# EAGLE board amphenol_npa201_pan (EAGLE 8.2.2), part 1 of 2
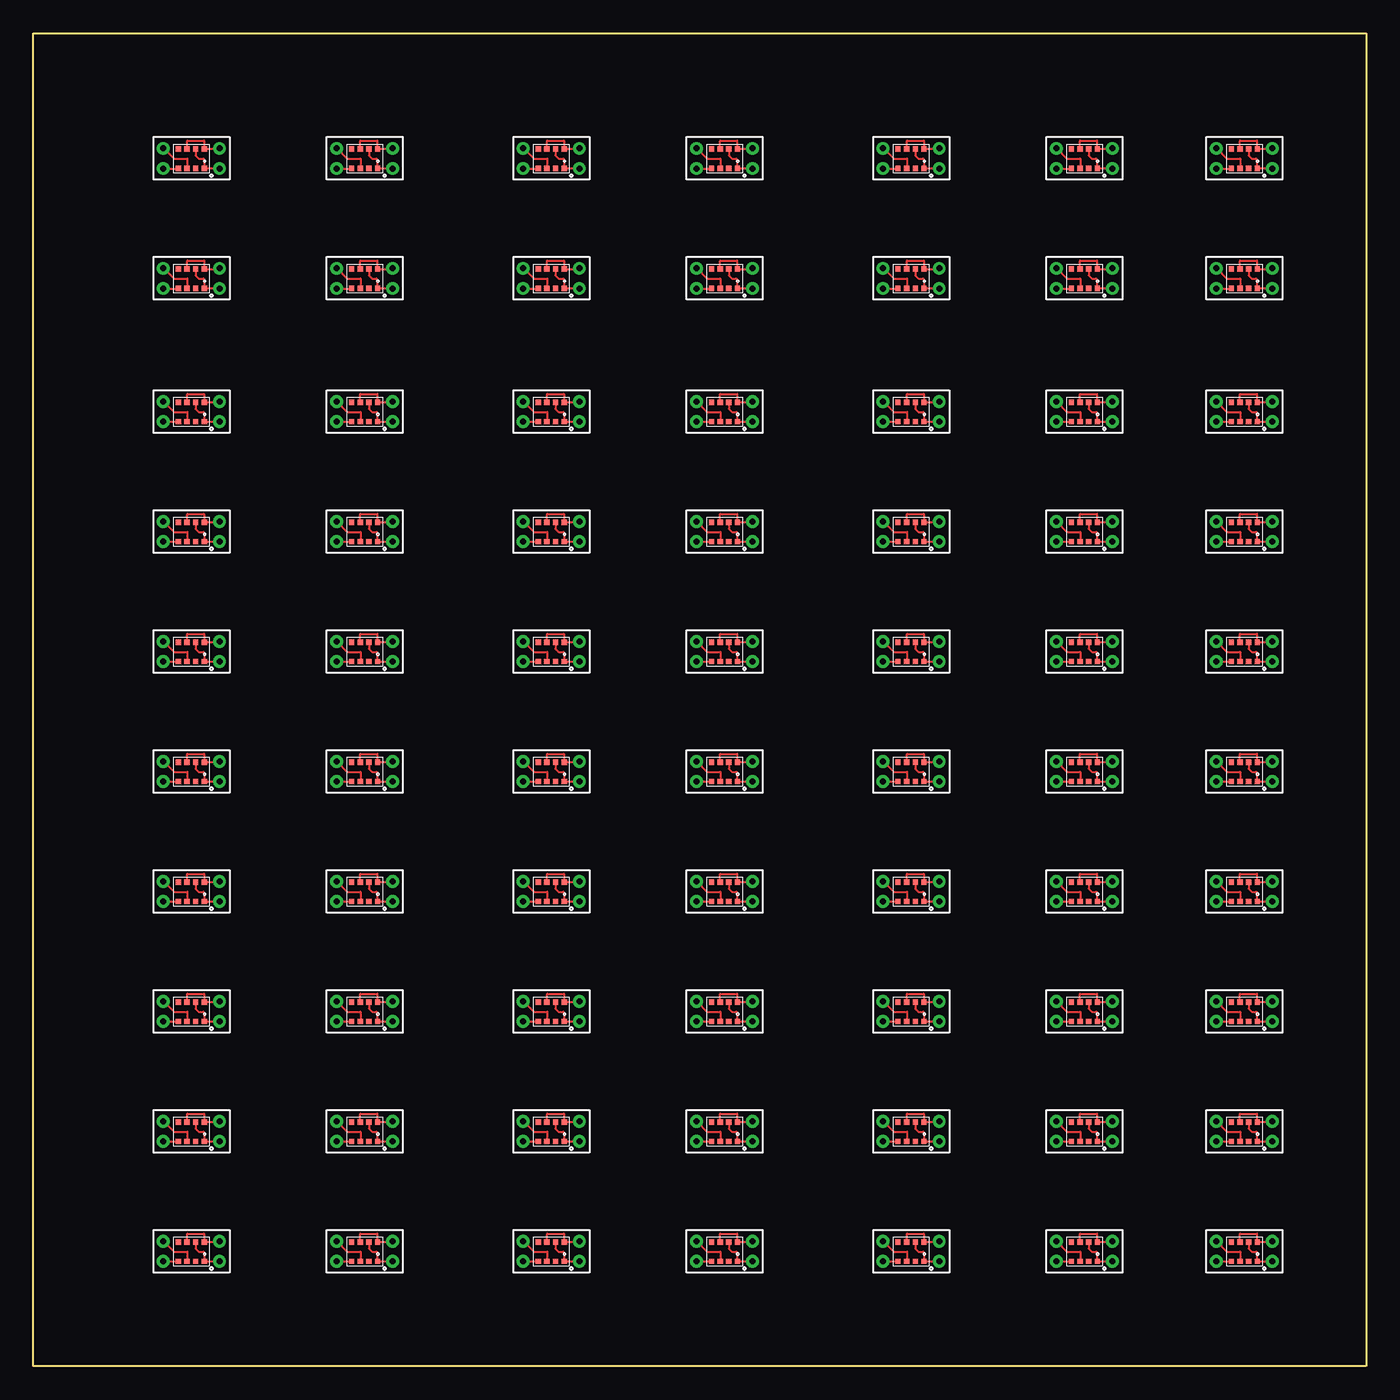
[diagram p0: board, top side]

Size 100 x 100 mm. Coordinates in mm from the lower left corner, seen from the top.
Outline: 0,0 0,100 100,100 100,0 0,0
Copper layers (1*16): Top 0.035mm / dielectric 1.5mm / Bottom 0.035mm
Design rules "default": minimum track width 6mil, minimum drill 0.35mm, track to track 6mil, track to pad 6mil, pad to pad 6mil, via to via 6mil, smd to smd 6mil, copper to edge 40mil, drill to drill 6mil, minimum pad ring 10mil, minimum via ring 8mil, stop-mask expansion 4mil, vias tented up to drill 0mil, thermal gap 10mil

## Footprints (pad centres in the part's own frame; a part is rotated, then mirrored left to right if it is on the bottom)
AMPHENOL_NPA201 = smd 0.4 x 0.4: P$1 0.975,-0.725; P$2 0.325,-0.725; P$3 -0.325,-0.725; P$4 -0.975,-0.725; P$5 -0.975,0.725; P$6 -0.325,0.725; P$7 0.325,0.725; P$8 0.975,0.725
WIREPAD_0,8/0,45 = drill 0.45 pad 0.71: P$1 0,0

## Placement (x,y rotation side)
U$1  AMPHENOL_NPA201  [AMPHENOL_NPA201]  11.85,8.6 0 top
U$2  WIREPAD_0,8/0,45  [WIREPAD_0,8/0,45]  9.75,9.36 0 top
U$3  WIREPAD_0,8/0,45  [WIREPAD_0,8/0,45]  9.75,7.86 0 top
U$4  WIREPAD_0,8/0,45  [WIREPAD_0,8/0,45]  13.97,9.36 0 top
U$5  WIREPAD_0,8/0,45  [WIREPAD_0,8/0,45]  13.97,7.86 0 top
U$6  WIREPAD_0,8/0,45  [WIREPAD_0,8/0,45]  9.75,18.36 0 top
U$7  WIREPAD_0,8/0,45  [WIREPAD_0,8/0,45]  9.75,16.86 0 top
U$8  WIREPAD_0,8/0,45  [WIREPAD_0,8/0,45]  13.97,18.36 0 top
U$9  WIREPAD_0,8/0,45  [WIREPAD_0,8/0,45]  13.97,16.86 0 top
U$10  AMPHENOL_NPA201  [AMPHENOL_NPA201]  11.85,17.6 0 top
U$11  WIREPAD_0,8/0,45  [WIREPAD_0,8/0,45]  9.75,27.36 0 top
U$12  WIREPAD_0,8/0,45  [WIREPAD_0,8/0,45]  9.75,25.86 0 top
U$13  WIREPAD_0,8/0,45  [WIREPAD_0,8/0,45]  13.97,27.36 0 top
U$14  WIREPAD_0,8/0,45  [WIREPAD_0,8/0,45]  13.97,25.86 0 top
U$15  AMPHENOL_NPA201  [AMPHENOL_NPA201]  11.85,26.6 0 top
U$16  WIREPAD_0,8/0,45  [WIREPAD_0,8/0,45]  9.75,36.36 0 top
U$17  WIREPAD_0,8/0,45  [WIREPAD_0,8/0,45]  9.75,34.86 0 top
U$18  WIREPAD_0,8/0,45  [WIREPAD_0,8/0,45]  13.97,36.36 0 top
U$19  WIREPAD_0,8/0,45  [WIREPAD_0,8/0,45]  13.97,34.86 0 top
U$20  AMPHENOL_NPA201  [AMPHENOL_NPA201]  11.85,35.6 0 top
U$21  WIREPAD_0,8/0,45  [WIREPAD_0,8/0,45]  9.75,45.36 0 top
U$22  WIREPAD_0,8/0,45  [WIREPAD_0,8/0,45]  9.75,43.86 0 top
U$23  WIREPAD_0,8/0,45  [WIREPAD_0,8/0,45]  13.97,45.36 0 top
U$24  WIREPAD_0,8/0,45  [WIREPAD_0,8/0,45]  13.97,43.86 0 top
U$25  AMPHENOL_NPA201  [AMPHENOL_NPA201]  11.85,44.6 0 top
U$26  WIREPAD_0,8/0,45  [WIREPAD_0,8/0,45]  9.75,54.36 0 top
U$27  WIREPAD_0,8/0,45  [WIREPAD_0,8/0,45]  9.75,52.86 0 top
U$28  WIREPAD_0,8/0,45  [WIREPAD_0,8/0,45]  13.97,54.36 0 top
U$29  WIREPAD_0,8/0,45  [WIREPAD_0,8/0,45]  13.97,52.86 0 top
U$30  AMPHENOL_NPA201  [AMPHENOL_NPA201]  11.85,53.6 0 top
U$31  WIREPAD_0,8/0,45  [WIREPAD_0,8/0,45]  9.75,63.36 0 top
U$32  WIREPAD_0,8/0,45  [WIREPAD_0,8/0,45]  9.75,61.86 0 top
U$33  WIREPAD_0,8/0,45  [WIREPAD_0,8/0,45]  13.97,63.36 0 top
U$34  WIREPAD_0,8/0,45  [WIREPAD_0,8/0,45]  13.97,61.86 0 top
U$35  AMPHENOL_NPA201  [AMPHENOL_NPA201]  11.85,62.6 0 top
U$36  WIREPAD_0,8/0,45  [WIREPAD_0,8/0,45]  9.75,72.36 0 top
U$37  WIREPAD_0,8/0,45  [WIREPAD_0,8/0,45]  9.75,70.86 0 top
U$38  WIREPAD_0,8/0,45  [WIREPAD_0,8/0,45]  13.97,72.36 0 top
U$39  WIREPAD_0,8/0,45  [WIREPAD_0,8/0,45]  13.97,70.86 0 top
U$40  AMPHENOL_NPA201  [AMPHENOL_NPA201]  11.85,71.6 0 top
U$41  WIREPAD_0,8/0,45  [WIREPAD_0,8/0,45]  9.75,82.36 0 top
U$42  WIREPAD_0,8/0,45  [WIREPAD_0,8/0,45]  9.75,80.86 0 top
U$43  WIREPAD_0,8/0,45  [WIREPAD_0,8/0,45]  13.97,82.36 0 top
U$44  WIREPAD_0,8/0,45  [WIREPAD_0,8/0,45]  13.97,80.86 0 top
U$45  AMPHENOL_NPA201  [AMPHENOL_NPA201]  11.85,81.6 0 top
U$46  WIREPAD_0,8/0,45  [WIREPAD_0,8/0,45]  9.75,91.36 0 top
U$47  WIREPAD_0,8/0,45  [WIREPAD_0,8/0,45]  9.75,89.86 0 top
U$48  WIREPAD_0,8/0,45  [WIREPAD_0,8/0,45]  13.97,91.36 0 top
U$49  WIREPAD_0,8/0,45  [WIREPAD_0,8/0,45]  13.97,89.86 0 top
U$50  AMPHENOL_NPA201  [AMPHENOL_NPA201]  11.85,90.6 0 top
U$51  WIREPAD_0,8/0,45  [WIREPAD_0,8/0,45]  22.75,9.36 0 top
U$52  WIREPAD_0,8/0,45  [WIREPAD_0,8/0,45]  22.75,7.86 0 top
U$53  WIREPAD_0,8/0,45  [WIREPAD_0,8/0,45]  26.97,9.36 0 top
U$54  WIREPAD_0,8/0,45  [WIREPAD_0,8/0,45]  26.97,7.86 0 top
U$55  AMPHENOL_NPA201  [AMPHENOL_NPA201]  24.85,8.6 0 top
U$56  WIREPAD_0,8/0,45  [WIREPAD_0,8/0,45]  22.75,18.36 0 top
U$57  WIREPAD_0,8/0,45  [WIREPAD_0,8/0,45]  22.75,16.86 0 top
U$58  WIREPAD_0,8/0,45  [WIREPAD_0,8/0,45]  26.97,18.36 0 top
U$59  WIREPAD_0,8/0,45  [WIREPAD_0,8/0,45]  26.97,16.86 0 top
U$60  AMPHENOL_NPA201  [AMPHENOL_NPA201]  24.85,17.6 0 top
U$61  WIREPAD_0,8/0,45  [WIREPAD_0,8/0,45]  22.75,27.36 0 top
U$62  WIREPAD_0,8/0,45  [WIREPAD_0,8/0,45]  22.75,25.86 0 top
U$63  WIREPAD_0,8/0,45  [WIREPAD_0,8/0,45]  26.97,27.36 0 top
U$64  WIREPAD_0,8/0,45  [WIREPAD_0,8/0,45]  26.97,25.86 0 top
U$65  AMPHENOL_NPA201  [AMPHENOL_NPA201]  24.85,26.6 0 top
U$66  WIREPAD_0,8/0,45  [WIREPAD_0,8/0,45]  22.75,36.36 0 top
U$67  WIREPAD_0,8/0,45  [WIREPAD_0,8/0,45]  22.75,34.86 0 top
U$68  WIREPAD_0,8/0,45  [WIREPAD_0,8/0,45]  26.97,36.36 0 top
U$69  WIREPAD_0,8/0,45  [WIREPAD_0,8/0,45]  26.97,34.86 0 top
U$70  AMPHENOL_NPA201  [AMPHENOL_NPA201]  24.85,35.6 0 top
U$71  WIREPAD_0,8/0,45  [WIREPAD_0,8/0,45]  22.75,45.36 0 top
U$72  WIREPAD_0,8/0,45  [WIREPAD_0,8/0,45]  22.75,43.86 0 top
U$73  WIREPAD_0,8/0,45  [WIREPAD_0,8/0,45]  26.97,45.36 0 top
U$74  WIREPAD_0,8/0,45  [WIREPAD_0,8/0,45]  26.97,43.86 0 top
U$75  AMPHENOL_NPA201  [AMPHENOL_NPA201]  24.85,44.6 0 top
U$76  WIREPAD_0,8/0,45  [WIREPAD_0,8/0,45]  22.75,54.36 0 top
U$77  WIREPAD_0,8/0,45  [WIREPAD_0,8/0,45]  22.75,52.86 0 top
U$78  WIREPAD_0,8/0,45  [WIREPAD_0,8/0,45]  26.97,54.36 0 top
U$79  WIREPAD_0,8/0,45  [WIREPAD_0,8/0,45]  26.97,52.86 0 top
U$80  AMPHENOL_NPA201  [AMPHENOL_NPA201]  24.85,53.6 0 top
U$81  WIREPAD_0,8/0,45  [WIREPAD_0,8/0,45]  22.75,63.36 0 top
U$82  WIREPAD_0,8/0,45  [WIREPAD_0,8/0,45]  22.75,61.86 0 top
U$83  WIREPAD_0,8/0,45  [WIREPAD_0,8/0,45]  26.97,63.36 0 top
U$84  WIREPAD_0,8/0,45  [WIREPAD_0,8/0,45]  26.97,61.86 0 top
U$85  AMPHENOL_NPA201  [AMPHENOL_NPA201]  24.85,62.6 0 top
U$86  WIREPAD_0,8/0,45  [WIREPAD_0,8/0,45]  22.75,72.36 0 top
U$87  WIREPAD_0,8/0,45  [WIREPAD_0,8/0,45]  22.75,70.86 0 top
U$88  WIREPAD_0,8/0,45  [WIREPAD_0,8/0,45]  26.97,72.36 0 top
U$89  WIREPAD_0,8/0,45  [WIREPAD_0,8/0,45]  26.97,70.86 0 top
U$90  AMPHENOL_NPA201  [AMPHENOL_NPA201]  24.85,71.6 0 top
U$91  WIREPAD_0,8/0,45  [WIREPAD_0,8/0,45]  22.75,82.36 0 top
U$92  WIREPAD_0,8/0,45  [WIREPAD_0,8/0,45]  22.75,80.86 0 top
U$93  WIREPAD_0,8/0,45  [WIREPAD_0,8/0,45]  26.97,82.36 0 top
U$94  WIREPAD_0,8/0,45  [WIREPAD_0,8/0,45]  26.97,80.86 0 top
U$95  AMPHENOL_NPA201  [AMPHENOL_NPA201]  24.85,81.6 0 top
U$96  WIREPAD_0,8/0,45  [WIREPAD_0,8/0,45]  22.75,91.36 0 top
U$97  WIREPAD_0,8/0,45  [WIREPAD_0,8/0,45]  22.75,89.86 0 top
U$98  WIREPAD_0,8/0,45  [WIREPAD_0,8/0,45]  26.97,91.36 0 top
U$99  WIREPAD_0,8/0,45  [WIREPAD_0,8/0,45]  26.97,89.86 0 top
U$100  AMPHENOL_NPA201  [AMPHENOL_NPA201]  24.85,90.6 0 top
U$101  WIREPAD_0,8/0,45  [WIREPAD_0,8/0,45]  36.75,9.36 0 top
U$102  WIREPAD_0,8/0,45  [WIREPAD_0,8/0,45]  36.75,7.86 0 top
U$103  WIREPAD_0,8/0,45  [WIREPAD_0,8/0,45]  40.97,9.36 0 top
U$104  WIREPAD_0,8/0,45  [WIREPAD_0,8/0,45]  40.97,7.86 0 top
U$105  AMPHENOL_NPA201  [AMPHENOL_NPA201]  38.85,8.6 0 top
U$106  WIREPAD_0,8/0,45  [WIREPAD_0,8/0,45]  36.75,18.36 0 top
U$107  WIREPAD_0,8/0,45  [WIREPAD_0,8/0,45]  36.75,16.86 0 top
U$108  WIREPAD_0,8/0,45  [WIREPAD_0,8/0,45]  40.97,18.36 0 top
U$109  WIREPAD_0,8/0,45  [WIREPAD_0,8/0,45]  40.97,16.86 0 top
U$110  AMPHENOL_NPA201  [AMPHENOL_NPA201]  38.85,17.6 0 top
U$111  WIREPAD_0,8/0,45  [WIREPAD_0,8/0,45]  36.75,27.36 0 top
U$112  WIREPAD_0,8/0,45  [WIREPAD_0,8/0,45]  36.75,25.86 0 top
U$113  WIREPAD_0,8/0,45  [WIREPAD_0,8/0,45]  40.97,27.36 0 top
U$114  WIREPAD_0,8/0,45  [WIREPAD_0,8/0,45]  40.97,25.86 0 top
U$115  AMPHENOL_NPA201  [AMPHENOL_NPA201]  38.85,26.6 0 top
U$116  WIREPAD_0,8/0,45  [WIREPAD_0,8/0,45]  36.75,36.36 0 top
U$117  WIREPAD_0,8/0,45  [WIREPAD_0,8/0,45]  36.75,34.86 0 top
U$118  WIREPAD_0,8/0,45  [WIREPAD_0,8/0,45]  40.97,36.36 0 top
U$119  WIREPAD_0,8/0,45  [WIREPAD_0,8/0,45]  40.97,34.86 0 top
U$120  AMPHENOL_NPA201  [AMPHENOL_NPA201]  38.85,35.6 0 top
U$121  WIREPAD_0,8/0,45  [WIREPAD_0,8/0,45]  36.75,45.36 0 top
U$122  WIREPAD_0,8/0,45  [WIREPAD_0,8/0,45]  36.75,43.86 0 top
U$123  WIREPAD_0,8/0,45  [WIREPAD_0,8/0,45]  40.97,45.36 0 top
U$124  WIREPAD_0,8/0,45  [WIREPAD_0,8/0,45]  40.97,43.86 0 top
U$125  AMPHENOL_NPA201  [AMPHENOL_NPA201]  38.85,44.6 0 top
U$126  WIREPAD_0,8/0,45  [WIREPAD_0,8/0,45]  36.75,54.36 0 top
U$127  WIREPAD_0,8/0,45  [WIREPAD_0,8/0,45]  36.75,52.86 0 top
U$128  WIREPAD_0,8/0,45  [WIREPAD_0,8/0,45]  40.97,54.36 0 top
U$129  WIREPAD_0,8/0,45  [WIREPAD_0,8/0,45]  40.97,52.86 0 top
U$130  AMPHENOL_NPA201  [AMPHENOL_NPA201]  38.85,53.6 0 top
U$131  WIREPAD_0,8/0,45  [WIREPAD_0,8/0,45]  36.75,63.36 0 top
U$132  WIREPAD_0,8/0,45  [WIREPAD_0,8/0,45]  36.75,61.86 0 top
U$133  WIREPAD_0,8/0,45  [WIREPAD_0,8/0,45]  40.97,63.36 0 top
U$134  WIREPAD_0,8/0,45  [WIREPAD_0,8/0,45]  40.97,61.86 0 top
U$135  AMPHENOL_NPA201  [AMPHENOL_NPA201]  38.85,62.6 0 top
U$136  WIREPAD_0,8/0,45  [WIREPAD_0,8/0,45]  36.75,72.36 0 top
U$137  WIREPAD_0,8/0,45  [WIREPAD_0,8/0,45]  36.75,70.86 0 top
U$138  WIREPAD_0,8/0,45  [WIREPAD_0,8/0,45]  40.97,72.36 0 top
U$139  WIREPAD_0,8/0,45  [WIREPAD_0,8/0,45]  40.97,70.86 0 top
U$140  AMPHENOL_NPA201  [AMPHENOL_NPA201]  38.85,71.6 0 top
U$141  WIREPAD_0,8/0,45  [WIREPAD_0,8/0,45]  36.75,82.36 0 top
U$142  WIREPAD_0,8/0,45  [WIREPAD_0,8/0,45]  36.75,80.86 0 top
U$143  WIREPAD_0,8/0,45  [WIREPAD_0,8/0,45]  40.97,82.36 0 top
U$144  WIREPAD_0,8/0,45  [WIREPAD_0,8/0,45]  40.97,80.86 0 top
U$145  AMPHENOL_NPA201  [AMPHENOL_NPA201]  38.85,81.6 0 top
U$146  WIREPAD_0,8/0,45  [WIREPAD_0,8/0,45]  36.75,91.36 0 top
U$147  WIREPAD_0,8/0,45  [WIREPAD_0,8/0,45]  36.75,89.86 0 top
U$148  WIREPAD_0,8/0,45  [WIREPAD_0,8/0,45]  40.97,91.36 0 top
U$149  WIREPAD_0,8/0,45  [WIREPAD_0,8/0,45]  40.97,89.86 0 top
U$150  AMPHENOL_NPA201  [AMPHENOL_NPA201]  38.85,90.6 0 top
U$151  WIREPAD_0,8/0,45  [WIREPAD_0,8/0,45]  49.75,9.36 0 top
U$152  WIREPAD_0,8/0,45  [WIREPAD_0,8/0,45]  49.75,7.86 0 top
U$153  WIREPAD_0,8/0,45  [WIREPAD_0,8/0,45]  53.97,9.36 0 top
U$154  WIREPAD_0,8/0,45  [WIREPAD_0,8/0,45]  53.97,7.86 0 top
U$155  AMPHENOL_NPA201  [AMPHENOL_NPA201]  51.85,8.6 0 top
U$156  WIREPAD_0,8/0,45  [WIREPAD_0,8/0,45]  49.75,18.36 0 top
U$157  WIREPAD_0,8/0,45  [WIREPAD_0,8/0,45]  49.75,16.86 0 top
U$158  WIREPAD_0,8/0,45  [WIREPAD_0,8/0,45]  53.97,18.36 0 top
U$159  WIREPAD_0,8/0,45  [WIREPAD_0,8/0,45]  53.97,16.86 0 top
U$160  AMPHENOL_NPA201  [AMPHENOL_NPA201]  51.85,17.6 0 top
U$161  WIREPAD_0,8/0,45  [WIREPAD_0,8/0,45]  49.75,27.36 0 top
U$162  WIREPAD_0,8/0,45  [WIREPAD_0,8/0,45]  49.75,25.86 0 top
U$163  WIREPAD_0,8/0,45  [WIREPAD_0,8/0,45]  53.97,27.36 0 top
U$164  WIREPAD_0,8/0,45  [WIREPAD_0,8/0,45]  53.97,25.86 0 top
U$165  AMPHENOL_NPA201  [AMPHENOL_NPA201]  51.85,26.6 0 top
U$166  WIREPAD_0,8/0,45  [WIREPAD_0,8/0,45]  49.75,36.36 0 top
U$167  WIREPAD_0,8/0,45  [WIREPAD_0,8/0,45]  49.75,34.86 0 top
U$168  WIREPAD_0,8/0,45  [WIREPAD_0,8/0,45]  53.97,36.36 0 top
U$169  WIREPAD_0,8/0,45  [WIREPAD_0,8/0,45]  53.97,34.86 0 top
U$170  AMPHENOL_NPA201  [AMPHENOL_NPA201]  51.85,35.6 0 top
U$171  WIREPAD_0,8/0,45  [WIREPAD_0,8/0,45]  49.75,45.36 0 top
U$172  WIREPAD_0,8/0,45  [WIREPAD_0,8/0,45]  49.75,43.86 0 top
U$173  WIREPAD_0,8/0,45  [WIREPAD_0,8/0,45]  53.97,45.36 0 top
U$174  WIREPAD_0,8/0,45  [WIREPAD_0,8/0,45]  53.97,43.86 0 top
U$175  AMPHENOL_NPA201  [AMPHENOL_NPA201]  51.85,44.6 0 top
U$176  WIREPAD_0,8/0,45  [WIREPAD_0,8/0,45]  49.75,54.36 0 top
U$177  WIREPAD_0,8/0,45  [WIREPAD_0,8/0,45]  49.75,52.86 0 top
U$178  WIREPAD_0,8/0,45  [WIREPAD_0,8/0,45]  53.97,54.36 0 top
U$179  WIREPAD_0,8/0,45  [WIREPAD_0,8/0,45]  53.97,52.86 0 top
U$180  AMPHENOL_NPA201  [AMPHENOL_NPA201]  51.85,53.6 0 top
U$181  WIREPAD_0,8/0,45  [WIREPAD_0,8/0,45]  49.75,63.36 0 top
U$182  WIREPAD_0,8/0,45  [WIREPAD_0,8/0,45]  49.75,61.86 0 top
U$183  WIREPAD_0,8/0,45  [WIREPAD_0,8/0,45]  53.97,63.36 0 top
U$184  WIREPAD_0,8/0,45  [WIREPAD_0,8/0,45]  53.97,61.86 0 top
U$185  AMPHENOL_NPA201  [AMPHENOL_NPA201]  51.85,62.6 0 top
U$186  WIREPAD_0,8/0,45  [WIREPAD_0,8/0,45]  49.75,72.36 0 top
U$187  WIREPAD_0,8/0,45  [WIREPAD_0,8/0,45]  49.75,70.86 0 top
U$188  WIREPAD_0,8/0,45  [WIREPAD_0,8/0,45]  53.97,72.36 0 top
U$189  WIREPAD_0,8/0,45  [WIREPAD_0,8/0,45]  53.97,70.86 0 top
U$190  AMPHENOL_NPA201  [AMPHENOL_NPA201]  51.85,71.6 0 top
U$191  WIREPAD_0,8/0,45  [WIREPAD_0,8/0,45]  49.75,82.36 0 top
U$192  WIREPAD_0,8/0,45  [WIREPAD_0,8/0,45]  49.75,80.86 0 top
U$193  WIREPAD_0,8/0,45  [WIREPAD_0,8/0,45]  53.97,82.36 0 top
U$194  WIREPAD_0,8/0,45  [WIREPAD_0,8/0,45]  53.97,80.86 0 top
U$195  AMPHENOL_NPA201  [AMPHENOL_NPA201]  51.85,81.6 0 top
U$196  WIREPAD_0,8/0,45  [WIREPAD_0,8/0,45]  49.75,91.36 0 top
U$197  WIREPAD_0,8/0,45  [WIREPAD_0,8/0,45]  49.75,89.86 0 top
U$198  WIREPAD_0,8/0,45  [WIREPAD_0,8/0,45]  53.97,91.36 0 top
U$199  WIREPAD_0,8/0,45  [WIREPAD_0,8/0,45]  53.97,89.86 0 top
U$200  AMPHENOL_NPA201  [AMPHENOL_NPA201]  51.85,90.6 0 top
U$201  WIREPAD_0,8/0,45  [WIREPAD_0,8/0,45]  63.75,9.36 0 top
U$202  WIREPAD_0,8/0,45  [WIREPAD_0,8/0,45]  63.75,7.86 0 top
U$203  WIREPAD_0,8/0,45  [WIREPAD_0,8/0,45]  67.97,9.36 0 top
U$204  WIREPAD_0,8/0,45  [WIREPAD_0,8/0,45]  67.97,7.86 0 top
U$205  AMPHENOL_NPA201  [AMPHENOL_NPA201]  65.85,8.6 0 top
U$206  WIREPAD_0,8/0,45  [WIREPAD_0,8/0,45]  63.75,18.36 0 top
U$207  WIREPAD_0,8/0,45  [WIREPAD_0,8/0,45]  63.75,16.86 0 top
U$208  WIREPAD_0,8/0,45  [WIREPAD_0,8/0,45]  67.97,18.36 0 top
U$209  WIREPAD_0,8/0,45  [WIREPAD_0,8/0,45]  67.97,16.86 0 top
U$210  AMPHENOL_NPA201  [AMPHENOL_NPA201]  65.85,17.6 0 top
U$211  WIREPAD_0,8/0,45  [WIREPAD_0,8/0,45]  63.75,27.36 0 top
U$212  WIREPAD_0,8/0,45  [WIREPAD_0,8/0,45]  63.75,25.86 0 top
U$213  WIREPAD_0,8/0,45  [WIREPAD_0,8/0,45]  67.97,27.36 0 top
U$214  WIREPAD_0,8/0,45  [WIREPAD_0,8/0,45]  67.97,25.86 0 top
U$215  AMPHENOL_NPA201  [AMPHENOL_NPA201]  65.85,26.6 0 top
U$216  WIREPAD_0,8/0,45  [WIREPAD_0,8/0,45]  63.75,36.36 0 top
U$217  WIREPAD_0,8/0,45  [WIREPAD_0,8/0,45]  63.75,34.86 0 top
U$218  WIREPAD_0,8/0,45  [WIREPAD_0,8/0,45]  67.97,36.36 0 top
U$219  WIREPAD_0,8/0,45  [WIREPAD_0,8/0,45]  67.97,34.86 0 top
U$220  AMPHENOL_NPA201  [AMPHENOL_NPA201]  65.85,35.6 0 top
U$221  WIREPAD_0,8/0,45  [WIREPAD_0,8/0,45]  63.75,45.36 0 top
U$222  WIREPAD_0,8/0,45  [WIREPAD_0,8/0,45]  63.75,43.86 0 top
U$223  WIREPAD_0,8/0,45  [WIREPAD_0,8/0,45]  67.97,45.36 0 top
U$224  WIREPAD_0,8/0,45  [WIREPAD_0,8/0,45]  67.97,43.86 0 top
U$225  AMPHENOL_NPA201  [AMPHENOL_NPA201]  65.85,44.6 0 top
U$226  WIREPAD_0,8/0,45  [WIREPAD_0,8/0,45]  63.75,54.36 0 top
U$227  WIREPAD_0,8/0,45  [WIREPAD_0,8/0,45]  63.75,52.86 0 top
U$228  WIREPAD_0,8/0,45  [WIREPAD_0,8/0,45]  67.97,54.36 0 top
U$229  WIREPAD_0,8/0,45  [WIREPAD_0,8/0,45]  67.97,52.86 0 top
U$230  AMPHENOL_NPA201  [AMPHENOL_NPA201]  65.85,53.6 0 top
U$231  WIREPAD_0,8/0,45  [WIREPAD_0,8/0,45]  63.75,63.36 0 top
U$232  WIREPAD_0,8/0,45  [WIREPAD_0,8/0,45]  63.75,61.86 0 top
U$233  WIREPAD_0,8/0,45  [WIREPAD_0,8/0,45]  67.97,63.36 0 top
U$234  WIREPAD_0,8/0,45  [WIREPAD_0,8/0,45]  67.97,61.86 0 top
U$235  AMPHENOL_NPA201  [AMPHENOL_NPA201]  65.85,62.6 0 top
U$236  WIREPAD_0,8/0,45  [WIREPAD_0,8/0,45]  63.75,72.36 0 top
U$237  WIREPAD_0,8/0,45  [WIREPAD_0,8/0,45]  63.75,70.86 0 top
U$238  WIREPAD_0,8/0,45  [WIREPAD_0,8/0,45]  67.97,72.36 0 top
U$239  WIREPAD_0,8/0,45  [WIREPAD_0,8/0,45]  67.97,70.86 0 top
U$240  AMPHENOL_NPA201  [AMPHENOL_NPA201]  65.85,71.6 0 top
U$241  WIREPAD_0,8/0,45  [WIREPAD_0,8/0,45]  63.75,82.36 0 top
U$242  WIREPAD_0,8/0,45  [WIREPAD_0,8/0,45]  63.75,80.86 0 top
U$243  WIREPAD_0,8/0,45  [WIREPAD_0,8/0,45]  67.97,82.36 0 top
U$244  WIREPAD_0,8/0,45  [WIREPAD_0,8/0,45]  67.97,80.86 0 top
U$245  AMPHENOL_NPA201  [AMPHENOL_NPA201]  65.85,81.6 0 top
U$246  WIREPAD_0,8/0,45  [WIREPAD_0,8/0,45]  63.75,91.36 0 top
U$247  WIREPAD_0,8/0,45  [WIREPAD_0,8/0,45]  63.75,89.86 0 top
U$248  WIREPAD_0,8/0,45  [WIREPAD_0,8/0,45]  67.97,91.36 0 top
U$249  WIREPAD_0,8/0,45  [WIREPAD_0,8/0,45]  67.97,89.86 0 top
U$250  AMPHENOL_NPA201  [AMPHENOL_NPA201]  65.85,90.6 0 top
U$251  WIREPAD_0,8/0,45  [WIREPAD_0,8/0,45]  76.75,9.36 0 top
U$252  WIREPAD_0,8/0,45  [WIREPAD_0,8/0,45]  76.75,7.86 0 top
U$253  WIREPAD_0,8/0,45  [WIREPAD_0,8/0,45]  80.97,9.36 0 top
U$254  WIREPAD_0,8/0,45  [WIREPAD_0,8/0,45]  80.97,7.86 0 top
U$255  AMPHENOL_NPA201  [AMPHENOL_NPA201]  78.85,8.6 0 top
U$256  WIREPAD_0,8/0,45  [WIREPAD_0,8/0,45]  76.75,18.36 0 top
U$257  WIREPAD_0,8/0,45  [WIREPAD_0,8/0,45]  76.75,16.86 0 top
U$258  WIREPAD_0,8/0,45  [WIREPAD_0,8/0,45]  80.97,18.36 0 top
U$259  WIREPAD_0,8/0,45  [WIREPAD_0,8/0,45]  80.97,16.86 0 top
U$260  AMPHENOL_NPA201  [AMPHENOL_NPA201]  78.85,17.6 0 top
U$261  WIREPAD_0,8/0,45  [WIREPAD_0,8/0,45]  76.75,27.36 0 top
U$262  WIREPAD_0,8/0,45  [WIREPAD_0,8/0,45]  76.75,25.86 0 top
U$263  WIREPAD_0,8/0,45  [WIREPAD_0,8/0,45]  80.97,27.36 0 top
U$264  WIREPAD_0,8/0,45  [WIREPAD_0,8/0,45]  80.97,25.86 0 top
U$265  AMPHENOL_NPA201  [AMPHENOL_NPA201]  78.85,26.6 0 top
U$266  WIREPAD_0,8/0,45  [WIREPAD_0,8/0,45]  76.75,36.36 0 top
U$267  WIREPAD_0,8/0,45  [WIREPAD_0,8/0,45]  76.75,34.86 0 top
U$268  WIREPAD_0,8/0,45  [WIREPAD_0,8/0,45]  80.97,36.36 0 top
U$269  WIREPAD_0,8/0,45  [WIREPAD_0,8/0,45]  80.97,34.86 0 top
U$270  AMPHENOL_NPA201  [AMPHENOL_NPA201]  78.85,35.6 0 top
U$271  WIREPAD_0,8/0,45  [WIREPAD_0,8/0,45]  76.75,45.36 0 top
U$272  WIREPAD_0,8/0,45  [WIREPAD_0,8/0,45]  76.75,43.86 0 top
U$273  WIREPAD_0,8/0,45  [WIREPAD_0,8/0,45]  80.97,45.36 0 top
U$274  WIREPAD_0,8/0,45  [WIREPAD_0,8/0,45]  80.97,43.86 0 top
U$275  AMPHENOL_NPA201  [AMPHENOL_NPA201]  78.85,44.6 0 top
U$276  WIREPAD_0,8/0,45  [WIREPAD_0,8/0,45]  76.75,54.36 0 top
U$277  WIREPAD_0,8/0,45  [WIREPAD_0,8/0,45]  76.75,52.86 0 top
U$278  WIREPAD_0,8/0,45  [WIREPAD_0,8/0,45]  80.97,54.36 0 top
U$279  WIREPAD_0,8/0,45  [WIREPAD_0,8/0,45]  80.97,52.86 0 top
U$280  AMPHENOL_NPA201  [AMPHENOL_NPA201]  78.85,53.6 0 top
U$281  WIREPAD_0,8/0,45  [WIREPAD_0,8/0,45]  76.75,63.36 0 top
U$282  WIREPAD_0,8/0,45  [WIREPAD_0,8/0,45]  76.75,61.86 0 top
U$283  WIREPAD_0,8/0,45  [WIREPAD_0,8/0,45]  80.97,63.36 0 top
U$284  WIREPAD_0,8/0,45  [WIREPAD_0,8/0,45]  80.97,61.86 0 top
U$285  AMPHENOL_NPA201  [AMPHENOL_NPA201]  78.85,62.6 0 top
U$286  WIREPAD_0,8/0,45  [WIREPAD_0,8/0,45]  76.75,72.36 0 top
U$287  WIREPAD_0,8/0,45  [WIREPAD_0,8/0,45]  76.75,70.86 0 top
U$288  WIREPAD_0,8/0,45  [WIREPAD_0,8/0,45]  80.97,72.36 0 top
U$289  WIREPAD_0,8/0,45  [WIREPAD_0,8/0,45]  80.97,70.86 0 top
U$290  AMPHENOL_NPA201  [AMPHENOL_NPA201]  78.85,71.6 0 top
U$291  WIREPAD_0,8/0,45  [WIREPAD_0,8/0,45]  76.75,82.36 0 top
U$292  WIREPAD_0,8/0,45  [WIREPAD_0,8/0,45]  76.75,80.86 0 top
U$293  WIREPAD_0,8/0,45  [WIREPAD_0,8/0,45]  80.97,82.36 0 top
U$294  WIREPAD_0,8/0,45  [WIREPAD_0,8/0,45]  80.97,80.86 0 top
U$295  AMPHENOL_NPA201  [AMPHENOL_NPA201]  78.85,81.6 0 top
U$296  WIREPAD_0,8/0,45  [WIREPAD_0,8/0,45]  76.75,91.36 0 top
U$297  WIREPAD_0,8/0,45  [WIREPAD_0,8/0,45]  76.75,89.86 0 top
U$298  WIREPAD_0,8/0,45  [WIREPAD_0,8/0,45]  80.97,91.36 0 top
U$299  WIREPAD_0,8/0,45  [WIREPAD_0,8/0,45]  80.97,89.86 0 top
U$300  AMPHENOL_NPA201  [AMPHENOL_NPA201]  78.85,90.6 0 top
U$301  WIREPAD_0,8/0,45  [WIREPAD_0,8/0,45]  88.75,9.36 0 top
U$302  WIREPAD_0,8/0,45  [WIREPAD_0,8/0,45]  88.75,7.86 0 top
U$303  WIREPAD_0,8/0,45  [WIREPAD_0,8/0,45]  92.97,9.36 0 top
U$304  WIREPAD_0,8/0,45  [WIREPAD_0,8/0,45]  92.97,7.86 0 top
U$305  AMPHENOL_NPA201  [AMPHENOL_NPA201]  90.85,8.6 0 top
U$306  WIREPAD_0,8/0,45  [WIREPAD_0,8/0,45]  88.75,18.36 0 top
U$307  WIREPAD_0,8/0,45  [WIREPAD_0,8/0,45]  88.75,16.86 0 top
U$308  WIREPAD_0,8/0,45  [WIREPAD_0,8/0,45]  92.97,18.36 0 top
U$309  WIREPAD_0,8/0,45  [WIREPAD_0,8/0,45]  92.97,16.86 0 top
U$310  AMPHENOL_NPA201  [AMPHENOL_NPA201]  90.85,17.6 0 top
U$311  WIREPAD_0,8/0,45  [WIREPAD_0,8/0,45]  88.75,27.36 0 top
U$312  WIREPAD_0,8/0,45  [WIREPAD_0,8/0,45]  88.75,25.86 0 top
U$313  WIREPAD_0,8/0,45  [WIREPAD_0,8/0,45]  92.97,27.36 0 top
U$314  WIREPAD_0,8/0,45  [WIREPAD_0,8/0,45]  92.97,25.86 0 top
U$315  AMPHENOL_NPA201  [AMPHENOL_NPA201]  90.85,26.6 0 top
U$316  WIREPAD_0,8/0,45  [WIREPAD_0,8/0,45]  88.75,36.36 0 top
U$317  WIREPAD_0,8/0,45  [WIREPAD_0,8/0,45]  88.75,34.86 0 top
U$318  WIREPAD_0,8/0,45  [WIREPAD_0,8/0,45]  92.97,36.36 0 top
U$319  WIREPAD_0,8/0,45  [WIREPAD_0,8/0,45]  92.97,34.86 0 top
U$320  AMPHENOL_NPA201  [AMPHENOL_NPA201]  90.85,35.6 0 top
U$321  WIREPAD_0,8/0,45  [WIREPAD_0,8/0,45]  88.75,45.36 0 top
U$322  WIREPAD_0,8/0,45  [WIREPAD_0,8/0,45]  88.75,43.86 0 top
U$323  WIREPAD_0,8/0,45  [WIREPAD_0,8/0,45]  92.97,45.36 0 top
U$324  WIREPAD_0,8/0,45  [WIREPAD_0,8/0,45]  92.97,43.86 0 top
U$325  AMPHENOL_NPA201  [AMPHENOL_NPA201]  90.85,44.6 0 top
U$326  WIREPAD_0,8/0,45  [WIREPAD_0,8/0,45]  88.75,54.36 0 top
U$327  WIREPAD_0,8/0,45  [WIREPAD_0,8/0,45]  88.75,52.86 0 top
U$328  WIREPAD_0,8/0,45  [WIREPAD_0,8/0,45]  92.97,54.36 0 top
U$329  WIREPAD_0,8/0,45  [WIREPAD_0,8/0,45]  92.97,52.86 0 top
U$330  AMPHENOL_NPA201  [AMPHENOL_NPA201]  90.85,53.6 0 top
U$331  WIREPAD_0,8/0,45  [WIREPAD_0,8/0,45]  88.75,63.36 0 top
U$332  WIREPAD_0,8/0,45  [WIREPAD_0,8/0,45]  88.75,61.86 0 top
U$333  WIREPAD_0,8/0,45  [WIREPAD_0,8/0,45]  92.97,63.36 0 top
U$334  WIREPAD_0,8/0,45  [WIREPAD_0,8/0,45]  92.97,61.86 0 top
U$335  AMPHENOL_NPA201  [AMPHENOL_NPA201]  90.85,62.6 0 top
U$336  WIREPAD_0,8/0,45  [WIREPAD_0,8/0,45]  88.75,72.36 0 top
U$337  WIREPAD_0,8/0,45  [WIREPAD_0,8/0,45]  88.75,70.86 0 top
U$338  WIREPAD_0,8/0,45  [WIREPAD_0,8/0,45]  92.97,72.36 0 top
U$339  WIREPAD_0,8/0,45  [WIREPAD_0,8/0,45]  92.97,70.86 0 top
U$340  AMPHENOL_NPA201  [AMPHENOL_NPA201]  90.85,71.6 0 top
U$341  WIREPAD_0,8/0,45  [WIREPAD_0,8/0,45]  88.75,82.36 0 top
U$342  WIREPAD_0,8/0,45  [WIREPAD_0,8/0,45]  88.75,80.86 0 top
U$343  WIREPAD_0,8/0,45  [WIREPAD_0,8/0,45]  92.97,82.36 0 top
U$344  WIREPAD_0,8/0,45  [WIREPAD_0,8/0,45]  92.97,80.86 0 top
U$345  AMPHENOL_NPA201  [AMPHENOL_NPA201]  90.85,81.6 0 top
U$346  WIREPAD_0,8/0,45  [WIREPAD_0,8/0,45]  88.75,91.36 0 top
U$347  WIREPAD_0,8/0,45  [WIREPAD_0,8/0,45]  88.75,89.86 0 top
U$348  WIREPAD_0,8/0,45  [WIREPAD_0,8/0,45]  92.97,91.36 0 top
U$349  WIREPAD_0,8/0,45  [WIREPAD_0,8/0,45]  92.97,89.86 0 top
U$350  AMPHENOL_NPA201  [AMPHENOL_NPA201]  90.85,90.6 0 top

## Library data of the parts
U$1 U$10 U$15 U$20 U$25 U$30 U$35 U$40 U$45 U$50 U$55 U$60 U$65 U$70 U$75 U$80 U$85 U$90 U$95 U$100 U$105 U$110 U$115 U$120 U$125 U$130 U$135 U$140 U$145 U$150 U$155 U$160 U$165 U$170 U$175 U$180 U$185 U$190 U$195 U$200 U$205 U$210 U$215 U$220 U$225 U$230 U$235 U$240 U$245 U$250 U$255 U$260 U$265 U$270 U$275 U$280 U$285 U$290 U$295 U$300 U$305 U$310 U$315 U$320 U$325 U$330 U$335 U$340 U$345 U$350 = Amphenol_NPA201
U$2-U$9 U$11-U$14 U$16-U$19 U$21-U$24 U$26-U$29 U$31-U$34 U$36-U$39 U$41-U$44 U$46-U$49 U$51-U$54 U$56-U$59 U$61-U$64 U$66-U$69 U$71-U$74 U$76-U$79 U$81-U$84 U$86-U$89 U$91-U$94 U$96-U$99 U$101-U$104 U$106-U$109 U$111-U$114 U$116-U$119 U$121-U$124 U$126-U$129 U$131-U$134 U$136-U$139 U$141-U$144 U$146-U$149 U$151-U$154 U$156-U$159 U$161-U$164 U$166-U$169 U$171-U$174 U$176-U$179 U$181-U$184 U$186-U$189 U$191-U$194 U$196-U$199 U$201-U$204 U$206-U$209 U$211-U$214 U$216-U$219 U$221-U$224 U$226-U$229 U$231-U$234 U$236-U$239 U$241-U$244 U$246-U$249 U$251-U$254 U$256-U$259 U$261-U$264 U$266-U$269 U$271-U$274 U$276-U$279 U$281-U$284 U$286-U$289 U$291-U$294 U$296-U$299 U$301-U$304 U$306-U$309 U$311-U$314 U$316-U$319 U$321-U$324 U$326-U$329 U$331-U$334 U$336-U$339 U$341-U$344 U$346-U$349 = wirepad_08-045

## Nets
+3V1: U$8.P$1 U$10.P$6 U$10.P$8
+3V2: U$13.P$1 U$15.P$6 U$15.P$8
+3V3: U$1.P$6 U$1.P$8 U$4.P$1
+3V4: U$18.P$1 U$20.P$6 U$20.P$8
+3V5: U$23.P$1 U$25.P$6 U$25.P$8
+3V6: U$28.P$1 U$30.P$6 U$30.P$8
+3V7: U$33.P$1 U$35.P$6 U$35.P$8
+3V8: U$38.P$1 U$40.P$6 U$40.P$8
+3V9: U$43.P$1 U$45.P$6 U$45.P$8
+3V10: U$48.P$1 U$50.P$6 U$50.P$8
+3V11: U$53.P$1 U$55.P$6 U$55.P$8
+3V12: U$58.P$1 U$60.P$6 U$60.P$8
+3V13: U$63.P$1 U$65.P$6 U$65.P$8
+3V14: U$68.P$1 U$70.P$6 U$70.P$8
+3V15: U$73.P$1 U$75.P$6 U$75.P$8
+3V16: U$78.P$1 U$80.P$6 U$80.P$8
+3V17: U$83.P$1 U$85.P$6 U$85.P$8
+3V18: U$88.P$1 U$90.P$6 U$90.P$8
+3V19: U$93.P$1 U$95.P$6 U$95.P$8
+3V20: U$98.P$1 U$100.P$6 U$100.P$8
+3V21: U$103.P$1 U$105.P$6 U$105.P$8
+3V22: U$108.P$1 U$110.P$6 U$110.P$8
+3V23: U$113.P$1 U$115.P$6 U$115.P$8
+3V24: U$118.P$1 U$120.P$6 U$120.P$8
+3V25: U$123.P$1 U$125.P$6 U$125.P$8
+3V26: U$128.P$1 U$130.P$6 U$130.P$8
+3V27: U$133.P$1 U$135.P$6 U$135.P$8
+3V28: U$138.P$1 U$140.P$6 U$140.P$8
+3V29: U$143.P$1 U$145.P$6 U$145.P$8
+3V30: U$148.P$1 U$150.P$6 U$150.P$8
+3V31: U$153.P$1 U$155.P$6 U$155.P$8
+3V32: U$158.P$1 U$160.P$6 U$160.P$8
+3V33: U$163.P$1 U$165.P$6 U$165.P$8
+3V34: U$168.P$1 U$170.P$6 U$170.P$8
+3V35: U$173.P$1 U$175.P$6 U$175.P$8
+3V36: U$178.P$1 U$180.P$6 U$180.P$8
+3V37: U$183.P$1 U$185.P$6 U$185.P$8
+3V38: U$188.P$1 U$190.P$6 U$190.P$8
+3V39: U$193.P$1 U$195.P$6 U$195.P$8
+3V40: U$198.P$1 U$200.P$6 U$200.P$8
+3V41: U$203.P$1 U$205.P$6 U$205.P$8
+3V42: U$208.P$1 U$210.P$6 U$210.P$8
+3V43: U$213.P$1 U$215.P$6 U$215.P$8
+3V44: U$218.P$1 U$220.P$6 U$220.P$8
+3V45: U$223.P$1 U$225.P$6 U$225.P$8
+3V46: U$228.P$1 U$230.P$6 U$230.P$8
+3V47: U$233.P$1 U$235.P$6 U$235.P$8
+3V48: U$238.P$1 U$240.P$6 U$240.P$8
+3V49: U$243.P$1 U$245.P$6 U$245.P$8
+3V50: U$248.P$1 U$250.P$6 U$250.P$8
+3V51: U$253.P$1 U$255.P$6 U$255.P$8
+3V52: U$258.P$1 U$260.P$6 U$260.P$8
+3V53: U$263.P$1 U$265.P$6 U$265.P$8
+3V54: U$268.P$1 U$270.P$6 U$270.P$8
+3V55: U$273.P$1 U$275.P$6 U$275.P$8
+3V56: U$278.P$1 U$280.P$6 U$280.P$8
+3V57: U$283.P$1 U$285.P$6 U$285.P$8
+3V58: U$288.P$1 U$290.P$6 U$290.P$8
+3V59: U$293.P$1 U$295.P$6 U$295.P$8
+3V60: U$298.P$1 U$300.P$6 U$300.P$8
+3V61: U$303.P$1 U$305.P$6 U$305.P$8
+3V62: U$308.P$1 U$310.P$6 U$310.P$8
+3V63: U$313.P$1 U$315.P$6 U$315.P$8
+3V64: U$318.P$1 U$320.P$6 U$320.P$8
+3V65: U$323.P$1 U$325.P$6 U$325.P$8
+3V66: U$328.P$1 U$330.P$6 U$330.P$8
+3V67: U$333.P$1 U$335.P$6 U$335.P$8
+3V68: U$338.P$1 U$340.P$6 U$340.P$8
+3V69: U$343.P$1 U$345.P$6 U$345.P$8
+3V70: U$348.P$1 U$350.P$6 U$350.P$8
GND: U$1.P$1 U$1.P$7 U$5.P$1
GND1: U$9.P$1 U$10.P$1 U$10.P$7
GND2: U$14.P$1 U$15.P$1 U$15.P$7
GND3: U$19.P$1 U$20.P$1 U$20.P$7
GND4: U$24.P$1 U$25.P$1 U$25.P$7
GND5: U$29.P$1 U$30.P$1 U$30.P$7
GND6: U$34.P$1 U$35.P$1 U$35.P$7
GND7: U$39.P$1 U$40.P$1 U$40.P$7
GND8: U$44.P$1 U$45.P$1 U$45.P$7
GND9: U$49.P$1 U$50.P$1 U$50.P$7
GND10: U$54.P$1 U$55.P$1 U$55.P$7
GND11: U$59.P$1 U$60.P$1 U$60.P$7
GND12: U$64.P$1 U$65.P$1 U$65.P$7
GND13: U$69.P$1 U$70.P$1 U$70.P$7
GND14: U$74.P$1 U$75.P$1 U$75.P$7
GND15: U$79.P$1 U$80.P$1 U$80.P$7
GND16: U$84.P$1 U$85.P$1 U$85.P$7
GND17: U$89.P$1 U$90.P$1 U$90.P$7
GND18: U$94.P$1 U$95.P$1 U$95.P$7
GND19: U$99.P$1 U$100.P$1 U$100.P$7
GND20: U$104.P$1 U$105.P$1 U$105.P$7
GND21: U$109.P$1 U$110.P$1 U$110.P$7
GND22: U$114.P$1 U$115.P$1 U$115.P$7
GND23: U$119.P$1 U$120.P$1 U$120.P$7
GND24: U$124.P$1 U$125.P$1 U$125.P$7
GND25: U$129.P$1 U$130.P$1 U$130.P$7
GND26: U$134.P$1 U$135.P$1 U$135.P$7
GND27: U$139.P$1 U$140.P$1 U$140.P$7
GND28: U$144.P$1 U$145.P$1 U$145.P$7
GND29: U$149.P$1 U$150.P$1 U$150.P$7
GND30: U$154.P$1 U$155.P$1 U$155.P$7
GND31: U$159.P$1 U$160.P$1 U$160.P$7
GND32: U$164.P$1 U$165.P$1 U$165.P$7
GND33: U$169.P$1 U$170.P$1 U$170.P$7
GND34: U$174.P$1 U$175.P$1 U$175.P$7
GND35: U$179.P$1 U$180.P$1 U$180.P$7
GND36: U$184.P$1 U$185.P$1 U$185.P$7
GND37: U$189.P$1 U$190.P$1 U$190.P$7
GND38: U$194.P$1 U$195.P$1 U$195.P$7
GND39: U$199.P$1 U$200.P$1 U$200.P$7
GND40: U$204.P$1 U$205.P$1 U$205.P$7
GND41: U$209.P$1 U$210.P$1 U$210.P$7
GND42: U$214.P$1 U$215.P$1 U$215.P$7
GND43: U$219.P$1 U$220.P$1 U$220.P$7
GND44: U$224.P$1 U$225.P$1 U$225.P$7
GND45: U$229.P$1 U$230.P$1 U$230.P$7
GND46: U$234.P$1 U$235.P$1 U$235.P$7
GND47: U$239.P$1 U$240.P$1 U$240.P$7
GND48: U$244.P$1 U$245.P$1 U$245.P$7
GND49: U$249.P$1 U$250.P$1 U$250.P$7
GND50: U$254.P$1 U$255.P$1 U$255.P$7
GND51: U$259.P$1 U$260.P$1 U$260.P$7
GND52: U$264.P$1 U$265.P$1 U$265.P$7
GND53: U$269.P$1 U$270.P$1 U$270.P$7
GND54: U$274.P$1 U$275.P$1 U$275.P$7
GND55: U$279.P$1 U$280.P$1 U$280.P$7
GND56: U$284.P$1 U$285.P$1 U$285.P$7
GND57: U$289.P$1 U$290.P$1 U$290.P$7
GND58: U$294.P$1 U$295.P$1 U$295.P$7
GND59: U$299.P$1 U$300.P$1 U$300.P$7
GND60: U$304.P$1 U$305.P$1 U$305.P$7
GND61: U$309.P$1 U$310.P$1 U$310.P$7
GND62: U$314.P$1 U$315.P$1 U$315.P$7
GND63: U$319.P$1 U$320.P$1 U$320.P$7
GND64: U$324.P$1 U$325.P$1 U$325.P$7
GND65: U$329.P$1 U$330.P$1 U$330.P$7
GND66: U$334.P$1 U$335.P$1 U$335.P$7
GND67: U$339.P$1 U$340.P$1 U$340.P$7
GND68: U$344.P$1 U$345.P$1 U$345.P$7
GND69: U$349.P$1 U$350.P$1 U$350.P$7
N$1: U$1.P$3 U$2.P$1
N$2: U$1.P$4 U$3.P$1
N$3: U$6.P$1 U$10.P$3
N$4: U$7.P$1 U$10.P$4
N$5: U$11.P$1 U$15.P$3
N$6: U$12.P$1 U$15.P$4
N$7: U$16.P$1 U$20.P$3
N$8: U$17.P$1 U$20.P$4
N$9: U$21.P$1 U$25.P$3
N$10: U$22.P$1 U$25.P$4
N$11: U$26.P$1 U$30.P$3
N$12: U$27.P$1 U$30.P$4
N$13: U$31.P$1 U$35.P$3
N$14: U$32.P$1 U$35.P$4
N$15: U$36.P$1 U$40.P$3
N$16: U$37.P$1 U$40.P$4
N$17: U$41.P$1 U$45.P$3
N$18: U$42.P$1 U$45.P$4
N$19: U$46.P$1 U$50.P$3
N$20: U$47.P$1 U$50.P$4
N$21: U$51.P$1 U$55.P$3
N$22: U$52.P$1 U$55.P$4
N$23: U$56.P$1 U$60.P$3
N$24: U$57.P$1 U$60.P$4
N$25: U$61.P$1 U$65.P$3
N$26: U$62.P$1 U$65.P$4
N$27: U$66.P$1 U$70.P$3
N$28: U$67.P$1 U$70.P$4
N$29: U$71.P$1 U$75.P$3
N$30: U$72.P$1 U$75.P$4
N$31: U$76.P$1 U$80.P$3
N$32: U$77.P$1 U$80.P$4
N$33: U$81.P$1 U$85.P$3
N$34: U$82.P$1 U$85.P$4
N$35: U$86.P$1 U$90.P$3
N$36: U$87.P$1 U$90.P$4
N$37: U$91.P$1 U$95.P$3
N$38: U$92.P$1 U$95.P$4
N$39: U$96.P$1 U$100.P$3
N$40: U$97.P$1 U$100.P$4
N$41: U$101.P$1 U$105.P$3
N$42: U$102.P$1 U$105.P$4
N$43: U$106.P$1 U$110.P$3
N$44: U$107.P$1 U$110.P$4
N$45: U$111.P$1 U$115.P$3
N$46: U$112.P$1 U$115.P$4
N$47: U$116.P$1 U$120.P$3
N$48: U$117.P$1 U$120.P$4
N$49: U$121.P$1 U$125.P$3
N$50: U$122.P$1 U$125.P$4
N$51: U$126.P$1 U$130.P$3
N$52: U$127.P$1 U$130.P$4
N$53: U$131.P$1 U$135.P$3
N$54: U$132.P$1 U$135.P$4
N$55: U$136.P$1 U$140.P$3
N$56: U$137.P$1 U$140.P$4
N$57: U$141.P$1 U$145.P$3
N$58: U$142.P$1 U$145.P$4
N$59: U$146.P$1 U$150.P$3
N$60: U$147.P$1 U$150.P$4
N$61: U$151.P$1 U$155.P$3
N$62: U$152.P$1 U$155.P$4
N$63: U$156.P$1 U$160.P$3
N$64: U$157.P$1 U$160.P$4
N$65: U$161.P$1 U$165.P$3
N$66: U$162.P$1 U$165.P$4
N$67: U$166.P$1 U$170.P$3
N$68: U$167.P$1 U$170.P$4
N$69: U$171.P$1 U$175.P$3
N$70: U$172.P$1 U$175.P$4
N$71: U$176.P$1 U$180.P$3
N$72: U$177.P$1 U$180.P$4
N$73: U$181.P$1 U$185.P$3
N$74: U$182.P$1 U$185.P$4
N$75: U$186.P$1 U$190.P$3
N$76: U$187.P$1 U$190.P$4
N$77: U$191.P$1 U$195.P$3
N$78: U$192.P$1 U$195.P$4
N$79: U$196.P$1 U$200.P$3
N$80: U$197.P$1 U$200.P$4
N$81: U$201.P$1 U$205.P$3
N$82: U$202.P$1 U$205.P$4
N$83: U$206.P$1 U$210.P$3
N$84: U$207.P$1 U$210.P$4
N$85: U$211.P$1 U$215.P$3
N$86: U$212.P$1 U$215.P$4
N$87: U$216.P$1 U$220.P$3
N$88: U$217.P$1 U$220.P$4
N$89: U$221.P$1 U$225.P$3
N$90: U$222.P$1 U$225.P$4
N$91: U$226.P$1 U$230.P$3
N$92: U$227.P$1 U$230.P$4
N$93: U$231.P$1 U$235.P$3
N$94: U$232.P$1 U$235.P$4
N$95: U$236.P$1 U$240.P$3
N$96: U$237.P$1 U$240.P$4
N$97: U$241.P$1 U$245.P$3
N$98: U$242.P$1 U$245.P$4
N$99: U$246.P$1 U$250.P$3
N$100: U$247.P$1 U$250.P$4
N$101: U$251.P$1 U$255.P$3
N$102: U$252.P$1 U$255.P$4
N$103: U$256.P$1 U$260.P$3
N$104: U$257.P$1 U$260.P$4
N$105: U$261.P$1 U$265.P$3
N$106: U$262.P$1 U$265.P$4
N$107: U$266.P$1 U$270.P$3
N$108: U$267.P$1 U$270.P$4
N$109: U$271.P$1 U$275.P$3
N$110: U$272.P$1 U$275.P$4
N$111: U$276.P$1 U$280.P$3
N$112: U$277.P$1 U$280.P$4
N$113: U$281.P$1 U$285.P$3
N$114: U$282.P$1 U$285.P$4
N$115: U$286.P$1 U$290.P$3
N$116: U$287.P$1 U$290.P$4
N$117: U$291.P$1 U$295.P$3
N$118: U$292.P$1 U$295.P$4
N$119: U$296.P$1 U$300.P$3
N$120: U$297.P$1 U$300.P$4
N$121: U$301.P$1 U$305.P$3
N$122: U$302.P$1 U$305.P$4
N$123: U$306.P$1 U$310.P$3
N$124: U$307.P$1 U$310.P$4
N$125: U$311.P$1 U$315.P$3
N$126: U$312.P$1 U$315.P$4
N$127: U$316.P$1 U$320.P$3
N$128: U$317.P$1 U$320.P$4
N$129: U$321.P$1 U$325.P$3
N$130: U$322.P$1 U$325.P$4
N$131: U$326.P$1 U$330.P$3
N$132: U$327.P$1 U$330.P$4
N$133: U$331.P$1 U$335.P$3
N$134: U$332.P$1 U$335.P$4
N$135: U$336.P$1 U$340.P$3
N$136: U$337.P$1 U$340.P$4
N$137: U$341.P$1 U$345.P$3
N$138: U$342.P$1 U$345.P$4
N$139: U$346.P$1 U$350.P$3
N$140: U$347.P$1 U$350.P$4